# Altium PCB PCB.PcbDoc (part 1 of 2)
Units mm, origin at the board's own origin, x right, y up, seen from the top; angles counter-clockwise.
Board outline 53.59 x 68.71 mm, 2 copper layers (Top Layer, Bottom Layer), stack 1.571 mm thick; 66 components, 64 nets, 259 pads, 241 vias.
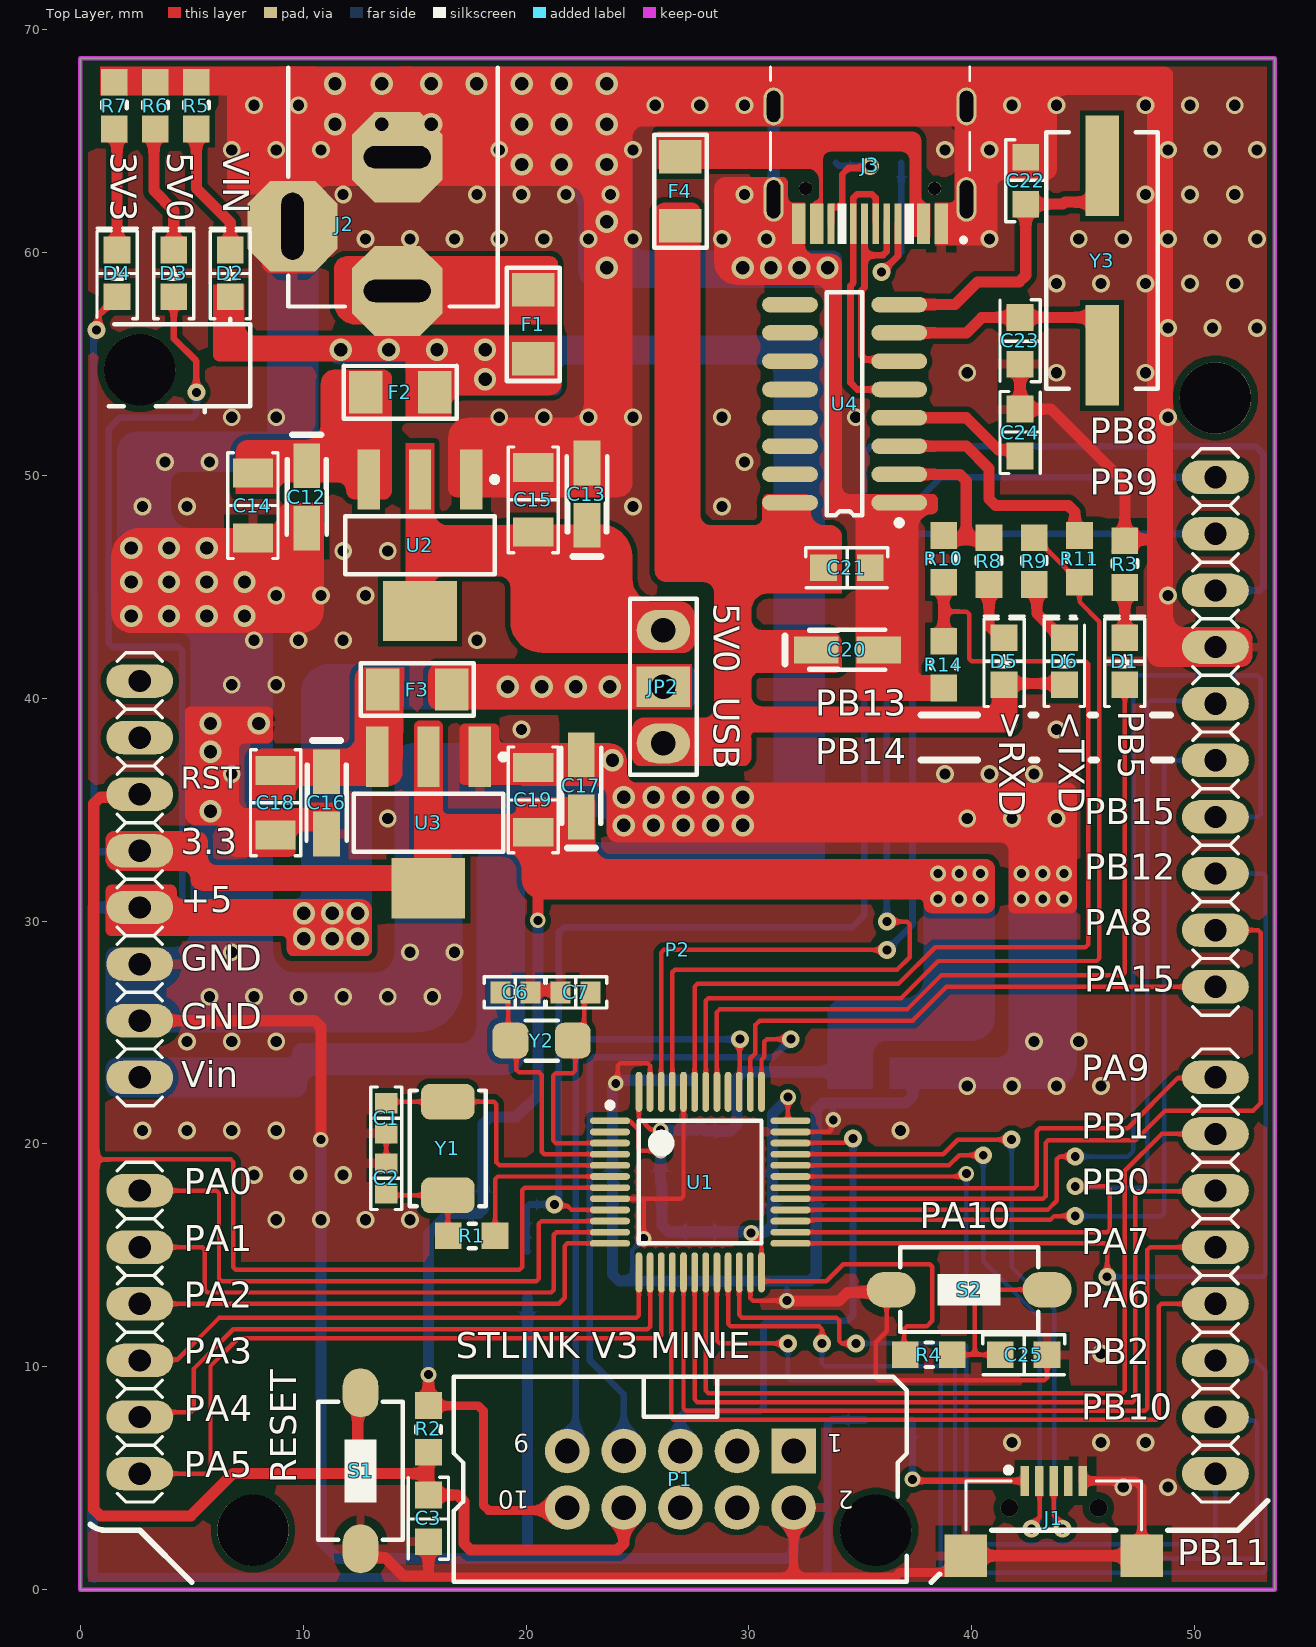
[diagram p0: Top Layer view]
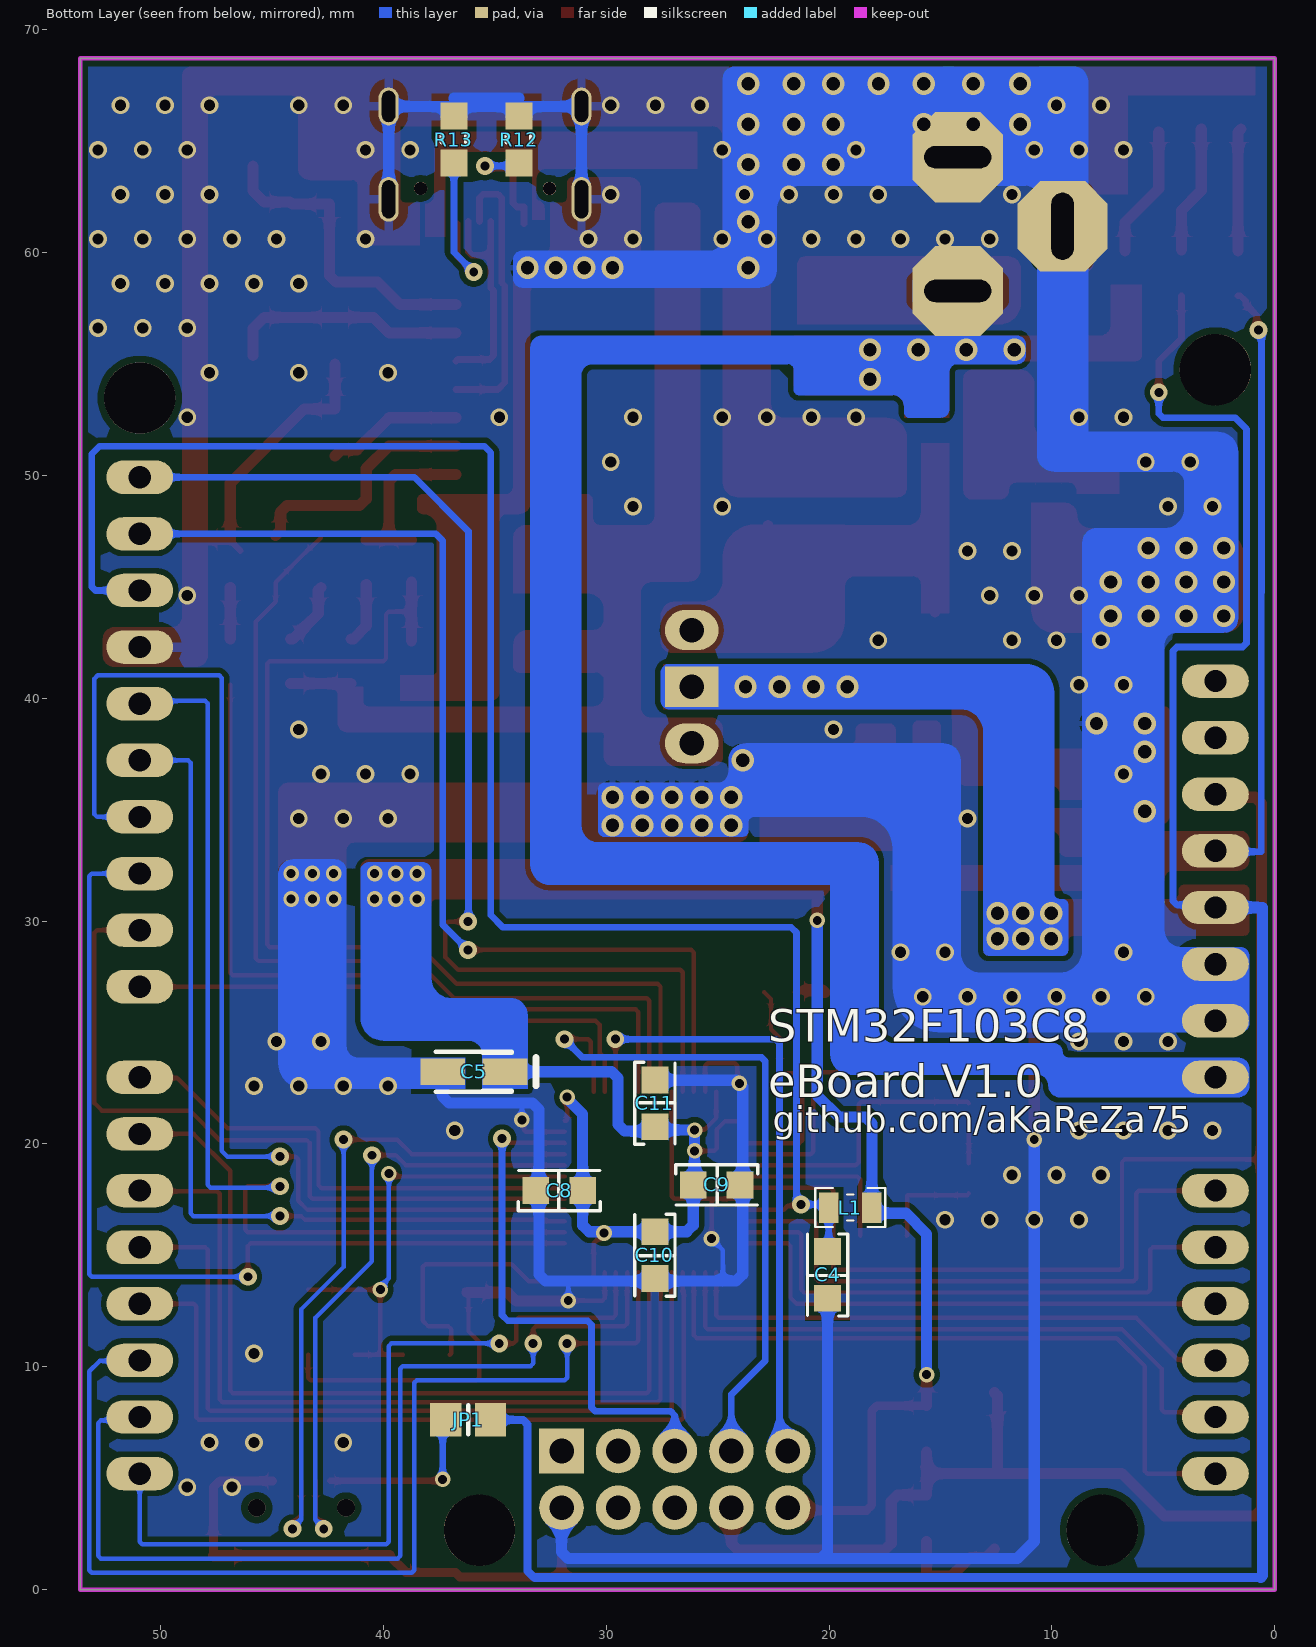
[diagram p1: Bottom Layer view, seen from below]

## Layer stack, top to bottom
Top Solder: solder mask 0.0102, Solder Resist, Dk 3.5
Top Layer: signal copper 0.0356
Dielectric 1: dielectric 1.5, FR-4, Dk 4.8
Bottom Layer: signal copper 0.0356
Bottom Solder: solder mask 0.0102, Solder Resist, Dk 3.5

## Board outline
0,0 0,68.707 53.594,68.707 53.594,0

## Design rules (kind name [scope] priority, off if disabled: settings)
AcuteAngle [All] p1: minimum=6.00000000000000E+0001 checktracksonly=TRUE
AssemblyTestPointUsage [All] p1 off:
AssemblyTestpoint [All] p1 off: testpointundercomponent=TRUE minsize=1.016 maxsize=2.54 preferedsize=1.524 minholesize=0 maxholesize=1.016 preferedholesize=0.813 testpointgrid=0.025 usegrid=TRUE gridtolerance=0 allowsidetop=TRUE allowsidebottom=TRUE
BoardOutlineClearance [All] p1: gap=0.2 ignorepadtopadclearanceinfootprint=FALSE
Clearance Poly_Clearance [All vs InPolygon] p1: gap=0.25 ignorepadtopadclearanceinfootprint=TRUE except(0.3: Arc-Hole Track-Hole SMDPad-Hole THPad-Hole Via-Hole Fill-Hole Poly-Hole Region-Hole Text-Hole)
Clearance [All] p2: gap=0.2 ignorepadtopadclearanceinfootprint=FALSE except(0.3: Arc-Hole Track-Hole SMDPad-Hole THPad-Hole Via-Hole Fill-Hole Poly-Hole Region-Hole Text-Hole)
FabricationTestPointUsage [All] p1 off: valid=0 allowmultiple=FALSE
FabricationTestpoint [All] p1 off: side=3 testpointundercomponent=TRUE minsize=1.016 maxsize=2.54 preferedsize=1.524 minholesize=0 maxholesize=1.016 preferedholesize=0.813 testpointgrid=0.025 allowsidetop=TRUE allowsidebottom=TRUE usegrid=TRUE gridtolerance=0
HoleSize [All] p1: absolutevalues=TRUE maxlimit=10 minlimit=0.4 maxpercent=80.000 minpercent=20.000
HoleToHoleClearance [All] p1: gap=0.3 allowstackedmicrovias=TRUE
MinimumAnnularRing [All] p1: minimumring=0.15
MinimumSolderMaskSliver [All] p1: minsoldermaskwidth=0.01
PolygonConnect [All] p1: thpad.connectstyle=Relief thpad.reliefconductorwidth=0.4 thpad.reliefentries=4 thpad.polygonreliefangle="90 Angle" thpad.airgapwidth=0.4 smdpad.connectstyle=Relief smdpad.reliefconductorwidth=0.4 smdpad.reliefentries=4 smdpad.polygonreliefangle="90 Angle" smdpad.airgapwidth=0.4 via.connectstyle=Direct via.reliefconductorwidth=0.254 via.reliefentries=4 via.polygonreliefangle="90 Angle" via.airgapwidth=0.254
RoutingVias [All] p1: holewidth=0.4 width=0.7 viastyle="Through Hole" minholewidth=0.4 minwidth=0.7 maxholewidth=3 maxwidth=6
SilkToSilkClearance [All] p1: silktosilkclearance=0
SilkToSolderMaskClearance [IsPad] p1: minsilkscreentomaskgap=0.01 clearancetoexposedcopper=TRUE
SolderMaskExpansion [All] p1: expansion=0.102 istentingtop=FALSE
Width [All] p1: maxlimit=10 minlimit=0.2 preferedwidth=0.2
21 further rules are at their usual default settings.

## Classes and differential pairs
component class U_USBtoTTL: C20 C21 C22 C23 C24 D5 D6 F4 J3 R8 R9 R10 R11 R12 R13 R14 U4 Y3
component class U_MicroController: C1 C2 C3 C4 C5 C6 C7 C8 C9 C10 C11 C25 D1 J1 JP1 L1 P1 P2 R1 R2 R3 R4 S1 S2 U1 Y1 Y2
component class U_Supply: C12 C13 C14 C15 C16 C17 C18 C19 D2 D3 D4 F1 F2 F3 J2 JP2 R5 R6 R7 U2 U3

## Components (designator, comment, footprint, x,y, rotation, side; value= is the part's Value field where it differs from the comment)
C1 "20p" "CAP 0603/1608" 13.73,21.151 r270 top
C2 "20p" "CAP 0603/1608" 13.726,18.456 r90 top
C3 "100n" "CAP 0805/2012" 15.621,3.175 r270 top
C4 "100n" "CAP 0805/2012" 20.066,14.097 r270 bottom
C5 "10u" SMT_C_Tantalum_A 35.941,23.241 r0 bottom
C6 "12.5p" "CAP 0603/1608" 19.518,26.797 r0 top
C7 "12.5p" "CAP 0603/1608" 22.225,26.797 r180 top
C8 "100n" "CAP 0805/2012" 32.131,17.907 r0 bottom
C9 "100n" "CAP 0805/2012" 25.019,18.161 r180 bottom
C10 "100n" "CAP 0805/2012" 27.813,14.986 r270 bottom
C11 "100n" "CAP 0805/2012" 27.813,21.844 r90 bottom
C12 "10u" SMT_C_Tantalum_A 10.16,49.022 r270 top
C13 "22u" SMT_C_Tantalum_A 22.733,49.149 r90 top
C14 "100n" "CAP 1206/3216" 7.747,48.641 r270 top
C15 "100n" "CAP 1206/3216" 20.32,48.895 r90 top
C16 "10u" SMT_C_Tantalum_A 11.049,35.306 r270 top
C17 "22u" SMT_C_Tantalum_A 22.479,36.068 r90 top
C18 "100n" "CAP 1206/3216" 8.763,35.306 r270 top
C19 "100n" "CAP 1206/3216" 20.32,35.433 r90 top
C20 "10u" SMT_C_Tantalum_A 34.414,42.164 r0 top
C21 "100n" "CAP 0805/2012" 34.417,45.847 r0 top
C22 "22p" "CAP 0805/2012" 42.418,63.237 r90 top
C23 "22p" "CAP 0805/2012" 42.164,56.007 r270 top
C24 "10n" "CAP 0805/2012" 42.164,51.943 r90 top
C25 "100n" "CAP 0805/2012" 42.35,10.541 r0 top
D1 "Green" "LED 0805/2012 GREEN" 46.863,41.656 r90 top
D2 "Yellow" "LED 0805/2012 YELLOW" 6.731,59.055 r90 top
D3 "Red" "LED 0805/2012 RED" 4.191,59.055 r90 top
D4 "Green" "LED 0805/2012 GREEN" 1.651,59.055 r90 top
D5 "RED" "LED 0805/2012 RED" 41.444,41.656 r90 top value=Red
D6 "RED" "LED 0805/2012 RED" 44.154,41.656 r90 top value=Red
F1 "3A" 1206_F 20.32,56.769 r270 top
F2 "0.5A" 1206_F 14.351,53.721 r180 top
F3 "0.5A" 1206_F 15.113,40.386 r180 top
F4 "500m" 1206_F 26.924,62.738 r270 top
J1 "Micro" USB_Micro_Standard 43.675,3.203 r90 top
J2 "Female" "Power Jack BIG" 14.224,72.771 r270 top
J3 "12b" "HRO_TYPE-C-31-M-12 - Extended" 35.433,66.548 r180 top
JP1 "Jumper" "RESC2012M (0805)" 36.195,7.62 r180 bottom
JP2 "0b" "jumper selector" 26.162,43.053 r270 top
L1 "100u" IND0805 19.05,17.145 r0 bottom
P1 "STLinkV3-minie" IDC2.54-10PIN 26.924,4.953 r180 top
P2 "UNO" ARDUINO_UNO_CONNECTOR 2.667,54.737 r270 top locked
R1 "390b" "RES 0805 (2012X06L)" 18.41,15.875 r180 top
R2 "10K" "RES 0805 (2012X06L)" 15.621,6.366 r90 top
R3 "1k" "RES 0805 (2012X06L)" 46.863,46.863 r270 top value=1K
R4 "10K" "RES 0805 (2012X06L)" 38.916,10.541 r180 top
R5 "1.8k" "RES 0805 (2012X06L)" 5.207,67.437 r270 top value=1.8K
R6 "680b" "RES 0805 (2012X06L)" 3.365,67.437 r270 top
R7 "220b" "RES 0805 (2012X06L)" 1.524,67.437 r270 top
R8 "680" "RES 0805 (2012X06L)" 40.767,46.999 r270 top
R9 "680" "RES 0805 (2012X06L)" 42.799,46.999 r270 top
R10 "1K" "RES 0805 (2012X06L)" 38.735,47.101 r270 top
R11 "1K" "RES 0805 (2012X06L)" 44.831,47.101 r270 top
R12 "4.7K" "RES 0805 (2012X06L)" 33.909,65.913 r270 bottom
R13 "4.7K" "RES 0805 (2012X06L)" 36.83,65.913 r270 bottom
R14 "1.8K" "RES 0805 (2012X06L)" 38.735,40.656 r90 top
S1 "PB" SW_PB_SMD_2PIN_SPST_6X3X2 12.573,5.334 r90 top
S2 "PB" SW_PB_SMD_2PIN_SPST_6X3X2 39.878,13.462 r180 top
U1 "STM32F103C8T6" LQFP48_N 27.813,18.288 r0 top
U2 "5V" SOT223_M 15.24,46.863 r270 top
U3 "3.3V" SOT223_M 15.621,34.417 r270 top
U4 "CH340G" SO16_M 34.29,53.213 r180 top
Y1 "8MHz" XTL_2_5032 16.489,19.796 r270 top
Y2 "32.768KHz" XTL_2_3215 20.701,24.638 r0 top
Y3 "12M" "Crystal SMD" 45.847,59.631 r270 top

## Footprints (in the part's own frame and the unit in brackets; to place one, negate y for a bottom-side part, rotate by r counter-clockwise, add the part's x,y. Pads: shape width x height; smd on the part's side, far side on the other; paste and mask are expansions set on the pad)
1206_F [mm] "Surface mount FUSE 1206"
  rect 1.5x1.9 smd: 1(-1.55,0) 2(1.55,0)
  silkscreen extent -2.54,-1.18 2.54,1.18, body extent -1.6,-0.83 1.6,0.83, height 0.56
ARDUINO_UNO_CONNECTOR [mm] "Arduino Uno Connector"
  oval 1.5x3 hole 1: AD1(36.83,0) AD2(39.37,0) AD3(41.91,0) AD4(44.45,0) AD5(46.99,0) AD6(49.53,0) IOH1(27.686,48.26) IOH2(25.146,48.26) IOH3(22.606,48.26) IOH4(20.066,48.26) IOH5(17.526,48.26) IOH6(14.986,48.26) IOH7(12.446,48.26) IOH8(9.906,48.26) IOH9(7.366,48.26) IOH10(4.826,48.26) IOL1(49.53,48.26) IOL2(46.99,48.26) IOL3(44.45,48.26) IOL4(41.91,48.26) IOL5(39.37,48.26) IOL6(36.83,48.26) IOL7(34.29,48.26) IOL8(31.75,48.26) POW1(13.97,0) POW2(16.51,0) POW3(19.05,0) POW4(21.59,0) POW5(24.13,0) POW6(26.67,0) POW7(29.21,0) POW8(31.75,0)
  round 3.2 hole 3.2: H1(0,0) H2(52.07,5.08) H3(52.07,33.02) H4(1.27,48.26)
  silkscreen extent 3.56,-2.21 54.41,50.6, body extent 3.31,-1.15 51.13,49.54, height 8.55
"CAP 0603/1608" [mm] "Chip Capacitor, 2-Leads, Body 1.60x0.80mm, IPC Medium Density"
  rect 0.9x1 smd: 1(-0.675,0) 2(0.675,0)
  silkscreen extent -1.4,-0.7 1.4,0.7, body extent -0.8,-0.41 0.8,0.41, height 0.82
"CAP 0805/2012" [mm] "Chip Capacitor, 2-Leads, Body 2.00x1.20mm, IPC Medium Density"
  rect 1.2x1.2 smd: 1(-1.075,0) 2(1.025,0)
  silkscreen extent -1.86,-0.9 1.82,0.9, body extent -1,-0.64 1,0.64, height 1.26
"CAP 1206/3216" [mm] "Chip Capacitor, 2-Leads, Body 3.25x1.60mm, IPC Medium Density"
  rect 1.3x1.8 smd: 1(-1.45,0) 2(1.45,0)
  silkscreen extent -2.37,-1.12 2.37,1.12, body extent -1.6,-0.81 1.6,0.81, height 1.62
"Crystal SMD" [mm] "DESIGNER ABBAS BASEREH"
  rect 4.5x1.5 smd: 1(-4.25,0) 2(4.25,0)
  silkscreen extent -5.75,-2.5 5.75,2.5, body extent -6.21,-2.25 6.09,2.25, height 5.18
"HRO_TYPE-C-31-M-12 - Extended" [mm]
  rect 0.6x1.8 smd mask+0.05: A1_B12(-3.2,5.264) A4_B9(-2.4,5.264) B1_A12(3.2,5.264) B4_A9(2.4,5.264)
  rect 0.3x1.8 smd mask+0.05: A5(-1.25,5.264) A6(-0.25,5.264) A7(0.25,5.264) B5(1.75,5.264) B6(0.75,5.264) B7(-0.75,5.264)
  oval 0.9x2 hole 0.6 slot 1.7 at 90 deg: S1(-4.325,4.17) S2(4.325,4.17)
  oval 0.9x1.7 hole 0.6 slot 1.4 at 90 deg: S3(-4.325,0) S4(4.325,0)
  round 0.6 hole 0.6 unplated: ""(-2.89,3.68) ""(2.89,3.68)
  silkscreen extent -4.47,-1.77 4.47,6.17, body extent -4.47,-2.6 4.47,5.31, height 3.31
IDC2.54-10PIN [mm] "Connector; IDC, Low Profile Male Header, Thru-Hole; 10 Position; Vertical; Pitch 2.54 mm; 20.32 x 9.2 x 9.45 mm (LxWxH) DESIGNER : ABBAS BASEREH"
  rect 2x2 hole 1.1: 1(-5.08,-1.27)
  round 2 hole 1.1: 2(-5.08,1.27) 3(-2.54,-1.27) 4(-2.54,1.27) 5(0,-1.27) 6(0,1.27) 7(2.54,-1.27) 8(2.54,1.27) 9(5.08,-1.27) 10(5.08,1.27)
  silkscreen extent -10.16,-4.6 10.16,4.6, body extent -10.15,-4.25 10.15,4.6, height 9.17
IND0805 [mm] "Chip Inductor, 2-Leads, Body 2/00x1/25mm, IPC Medium Density DESIGNER:ABBAS BASEREH"
  rect 0.87x1.37 smd: 1(-0.97,0) 2(0.97,0)
  silkscreen extent -1.58,-0.87 1.58,0.87, body extent -1.02,-0.65 1.02,0.65, height 0.5
"jumper selector" [mm]
  oval 1.8x2.4 hole 1.1: 1(0,0) 3(5.08,0)
  rect 1.8x2.4 hole 1.1: 2(2.54,0)
  silkscreen extent -1.4,-1.5 6.48,1.5, body extent -1.24,-1.27 6.38,1.27, height 10.16
"LED 0805/2012 GREEN" [mm] "Chip Diode, 2-Leads, Body 2.00x1.25mm, IPC Medium Density"
  rect 1.2x1.2 smd: 1(-1.05,0) 2(1.05,0)
  silkscreen extent -2.03,-0.9 2.03,0.9, body extent -1,-0.62 1,0.63, height 0.9
"LED 0805/2012 RED" [mm] "Chip Diode, 2-Leads, Body 2.00x1.25mm, IPC Medium Density"
  rect 1.2x1.2 smd: 1(-1.05,0) 2(1.05,0)
  silkscreen extent -2.03,-0.9 2.03,0.9, body extent -1,-0.62 1,0.63, height 0.9
"LED 0805/2012 YELLOW" [mm] "Chip Diode, 2-Leads, Body 2.00x1.25mm, IPC Medium Density"
  rect 1.2x1.2 smd: 1(-1.05,0) 2(1.05,0)
  silkscreen extent -2.03,-0.9 2.03,0.9, body extent -1,-0.62 1,0.63, height 0.9
LQFP48_N [mm] "Thin QFP, 48-Leads, Body 7x7mm, Pitch 0.5mm, IPC Medium Density"
  oval 1.8x0.3 smd: 1(-4.05,2.75) 2(-4.05,2.25) 3(-4.05,1.75) 4(-4.05,1.25) 5(-4.05,0.75) 6(-4.05,0.25) 7(-4.05,-0.25) 8(-4.05,-0.75) 9(-4.05,-1.25) 10(-4.05,-1.75) 11(-4.05,-2.25) 12(-4.05,-2.75) 25(4.05,-2.75) 26(4.05,-2.25) 27(4.05,-1.75) 28(4.05,-1.25) 29(4.05,-0.75) 30(4.05,-0.25) 31(4.05,0.25) 32(4.05,0.75) 33(4.05,1.25) 34(4.05,1.75) 35(4.05,2.25) 36(4.05,2.75)
  oval 0.3x1.8 smd: 13(-2.75,-4.05) 14(-2.25,-4.05) 15(-1.75,-4.05) 16(-1.25,-4.05) 17(-0.75,-4.05) 18(-0.25,-4.05) 19(0.25,-4.05) 20(0.75,-4.05) 21(1.25,-4.05) 22(1.75,-4.05) 23(2.25,-4.05) 24(2.75,-4.05) 37(2.75,4.05) 38(2.25,4.05) 39(1.75,4.05) 40(1.25,4.05) 41(0.75,4.05) 42(0.25,4.05) 43(-0.25,4.05) 44(-0.75,4.05) 45(-1.25,4.05) 46(-1.75,4.05) 47(-2.25,4.05) 48(-2.75,4.05)
  silkscreen extent -4.17,-2.75 2.75,3.57, body extent -4.51,-4.51 4.51,4.51, height 1.35
"Power Jack BIG" [mm] "Power Adaptor Jack"
  oct 4.05x4.05 hole 1 slot 3 at 90 deg: 1(14.5,0) 2(8.5,0)
  oct 4.05x4.05 hole 1 slot 3 at 0 deg: 3(11.6,-4.7)
  Top Layer region: 13.125,-5.7 13.625,-5.2 13.625,-4.2 13.125,-3.7 10.075,-3.7 9.575,-4.2 9.575,-5.2 10.075,-5.7
  Top Layer region: 7.5,-1.525 8,-2.025 9,-2.025 9.5,-1.525 9.5,1.525 9,2.025 8,2.025 7.5,1.525
  Top Layer region: 13.5,-1.525 14,-2.025 15,-2.025 15.5,-1.525 15.5,1.525 15,2.025 14,2.025 13.5,1.525
  Bottom Layer region: 13.125,-5.7 13.625,-5.2 13.625,-4.2 13.125,-3.7 10.075,-3.7 9.575,-4.2 9.575,-5.2 10.075,-5.7
  Bottom Layer region: 7.5,-1.525 8,-2.025 9,-2.025 9.5,-1.525 9.5,1.525 9,2.025 8,2.025 7.5,1.525
  Bottom Layer region: 13.5,-1.525 14,-2.025 15,-2.025 15.5,-1.525 15.5,1.525 15,2.025 14,2.025 13.5,1.525
  silkscreen extent 4.49,-4.9 15.2,4.5, body extent 0,-4.9 15.2,4.5, height 11
"RES 0805 (2012X06L)" [mm] "Chip Resistor, 2-Leads, Body 2.0x1.3mm, IPC High Density _ (0.100 W)"
  rect 1.2x1.2 smd: 1(-0.2,0) 2(1.9,0)
  silkscreen extent 0.67,-0.55 0.97,0.55, body extent -0.19,-0.63 1.84,0.64, height 0.6
"RESC2012M (0805)" [mm] "Chip Resistor, Body 2.0x1.3mm, IPC Low Density"
  rect 1.4x1.5 smd: 1(-1,0) 2(1,0)
  silkscreen extent 0,-0.65 0,0.65, body extent -1.02,-0.63 1.02,0.64, height 0.6
SMT_C_Tantalum_A [mm] "Capacitor, SM Tantalum; Body 3.2 x 1.6 mm (LxW typ)"
  rect 2x1.2 smd: 1(-1.4,0) 2(1.4,0)
  silkscreen extent -2.79,-0.9 1.7,0.9, body extent -1.6,-0.8 1.6,0.8, height 1.6
SO16_M [mm] "16-Pin Small Outline Integrated Circuit 1.27 mm Pitch, IPC Low Density - DESIGNER ABBAS BASEREH"
  oval 2.5x0.7 smd: 1(-2.45,4.445) 2(-2.45,3.175) 3(-2.45,1.905) 4(-2.45,0.635) 5(-2.45,-0.635) 6(-2.45,-1.905) 7(-2.45,-3.175) 8(-2.45,-4.445) 9(2.45,-4.445) 10(2.45,-3.175) 11(2.45,-1.905) 12(2.45,-0.635) 13(2.45,0.635) 14(2.45,1.905) 15(2.45,3.175) 16(2.45,4.445)
  silkscreen extent -2.58,-5 0.8,5.47, body extent -3,-4.97 3,4.96, height 1.62
SOT223_M [mm] "SOT223, 4-Leads, Body 6.5x3.5mm, Pitch 2.3mm, Lead Span 7mm, IPC Low Density"
  rect 2.7x1 smd: 1(-2.95,2.3) 2(-2.95,0) 3(-2.95,-2.3)
  rect 2.7x3.3 smd: 4(2.95,0)
  silkscreen extent -3.07,-3.35 1.3,3.48, body extent -3.42,-3.38 3.78,3.32, height 1.85
SW_PB_SMD_2PIN_SPST_6X3X2 [mm] "SWITCH, PUSHBUTTON, SMD, SPST, 6X3.5X2.5mm, RS-282G05A3, SKQYPA, 50000 Cycles"
  oval 2.2x1.6 smd mask+0.1: 1(-3.5,0) 2(3.5,0)
  silkscreen extent -3.1,-1.9 3.1,1.9, body extent -3.4,-1.86 3.4,1.86, height 2.5
USB_Micro_Standard [mm] "Micro USB Dock 5 Pin Standard"
  rect 1.35x0.4 smd: 1(1.679,1.3) 2(1.679,0.65) 3(1.679,0) 4(1.679,-0.65) 5(1.679,-1.3)
  rect 1.9x1.9 smd: 6(-1.679,-3.95) 7(-1.679,3.95)
  silkscreen extent -0.53,-3.94 2.29,3.94, body extent -4.32,-3.99 1.11,3.99, height 2.67
XTL_2_3215 [mm] "ABS07 3.2x1.5mm"
  rrect50% 1.6x1.6 smd mask+0.075: 1(-1.4,0) 2(1.4,0)
  Top Layer pour cut-out: -1.4,0.8 -1.4,-0.8 1.4,-0.8 1.4,0.8
  silkscreen extent -0.72,-0.9 0.72,0.9, body extent -1.61,-0.76 1.61,0.76, height 0.91
XTL_2_5032 [mm] "ABM3"
  rrect50% 1.6x2.4 smd: 1(-2.1,0) 2(2.1,0)
  Top Layer pour cut-out: -1.8,-1.6 1.8,-1.6 1.8,1.6 -1.8,1.6
  silkscreen extent -2.6,-1.7 2.6,1.7, body extent -2.6,-1.7 2.6,1.7, height 1.3

## Part data
C1 C2 C6 C7: library part Cap_Multi_SMD, "Bipolar ceramic capacitor SMD", Package=0603, Rating=Rating?, Inflow=inflow?, Type=Type?, Validation=Valid
C3 C4 C8 C9 C10 C11 C21 C25: library part Cap_Multi_SMD_100nF_0805, "Bipolar ceramic capacitor SMD", Package=0805, Rating=50V, Inflow=inflow?, Type=MultiLayer, Validation=Valid
C5 C13 C17 C20: library part Cap_Tantalum, "Tantalum Capacitor,TAJ Series-SMD", Package=Package?, Rating=6.3V, Inflow=inflow?, Type=Tantalum, Validation=Valid
C12 C16: library part Cap_Tantalum, "Tantalum Capacitor,TAJ Series-SMD", Package=Package?, Rating=16V, Inflow=inflow?, Type=Tantalum, Validation=Valid
C14 C15 C18 C19: library part Cap_Multi_SMD_100nF_1206, "Bipolar ceramic capacitor SMD", Package=1206, Rating=50V, Inflow=inflow?, Type=MultiLayer, Validation=Valid
C22 C23 C24: library part Cap_Multi_SMD_0805, "Bipolar ceramic capacitor SMD", Package=0805, Rating=Rating?, Inflow=inflow?, Type=MultiLayer, Validation=Valid
D1 D2 D3 D4 D5 D6: library part Semi_LED_SMD, "LED", Package=Package?, Rating=Rating?, Inflow=inflow?, Type=LED, Validation=Valid
F1 F2 F3 F4: library part Other_Elec_Fuse_SMD, "Short circiut  protection", Package=1206, Rating=Rating?, Inflow=inflow?, Type=Fast, Validation=Valid
J1: library part Con_USB2_Micro, "USB micro female", Package=Package?, Rating=Rating?, Inflow=inflow?, Type=Type?, Validation=NT
J2: library part Con_Power_Jack, "Power Jack", Package=Package?, Rating=Rating?, Inflow=6127, Type=Type?, Validation=Valid
J3: library part Con_USB_C, "USB C Female Connector", Package=SMD, Rating=Rating?, Inflow=inflow?, Type=C, Validation=Valid
JP1: library part Other_Elec_Jumper_0805, "Jumper Component", Package=0805, Rating=Rating?, Inflow=inflow?, Type=Type?, Validation=Valid
JP2: library part SW_Other_JSelector_Dip, "Jumper Selector", Package=Dip, Rating=Rating?, Inflow=5145, Type=Selector, Validation=NT
L1: library part Ind_SMD_0805, "Inductor", Package=0805, Rating=Rating?, Inflow=inflow?, Type=SMD, Validation=Valid
P1: library part Con_Prog_STLinkV3_SWD, "STLINK-V3MINIE debugger/programmer IDC probe for STM32 microcontrollers", Package=Package?, Rating=Rating?, Inflow=7119, Type=SWD, Validation=NT
P2: library part Con_Arduino_UNO_Con, "Arduino UNO Connector", Package=Package?, Rating=Rating?, Inflow=inflow?, Type=Type?, Validation=NT
R1 R2 R3 R4 R5 R6 R7 R8 R9 R10 R11 R12 R13 R14: library part Res_SMD_0805, "Resistor", Package=0805, Rating=0.125W, Inflow=inflow?, Type=10%, Validation=Valid
S1 S2: library part SW_PushButton_2_SMD, "SMT Tactile ‎Switch", Package=SMD, Rating=2b, Inflow=8260, Type=Vertical, Validation=Valid
U1: library part IC_MCU_STM32F103C8T6, "32-Bit mircrocontroller", Package=LQFP48, Rating=CORTEX-M3, Inflow=inflow?, Type=Microcontroller, Validation=NT
U2 U3: library part IC_Reg_AMS1117_3.3, "1'A Positive voltage regulator", Package=SOT223, Rating=1A, Inflow=5217, Type=LDO, Validation=Valid
U4: library part IC_Converter_CH340G, "TTL To USB Chip", Package=SO-16, Rating=Rating?, Inflow=inflow?, Type="USB to TTL", Validation=Valid
Y1: library part Other_Elec_Xtal_8MHZ_SMD, "Crystal Oscillator", Package=5032, Rating=10ppm, Inflow=inflow?, Type=Crystal, Validation=NT
Y2: library part Other_Elec_Xtal_32.768K_SMD, "Crystal Oscillator", Package=3215, Rating=20ppm, Inflow=inflow?, Type=Crystal, Validation=NT
Y3: library part Other_Elec_Xtal_SMD, "Crystal Oscillator", Package=SMD, Rating=Rating?, Inflow=inflow?, Type=Quartz, Validation=Valid

## Via types
v1: diameter 0.8, hole 0.5, Top Layer to Bottom Layer, tented both sides, 129 vias
v2: diameter 1, hole 0.6, Top Layer to Bottom Layer, tented both sides, 63 vias
v3: diameter 0.7, hole 0.4, Top Layer to Bottom Layer, tented both sides, 26 vias
v4: diameter 0.8, hole 0.4, Top Layer to Bottom Layer, tented both sides, 21 vias
v5: diameter 0.8, hole 0.8, Top Layer to Bottom Layer, tented both sides, 2 vias

## Nets (pads, with @x,y where several pads share a name; then routed paths per layer and width w, separated by ;. In a path a pad name is that pad's centre, name@x,y a point inside that pad or via, vN(x,y) a via of type N, cw(c..) or ccw(c..) an arc to the next point about the centre after c; other vN are vias at no path point)
+3.3: C5.1 C8.1 C9.1 C10.1 C11.1 C17.1 C19.1 D4.1 L1.1 P1.10 P2.POW4 R2.2 R4.2 U1.1 U1.24 U1.36 U1.48 U3.2 U3.4 | length 116
  Top Layer w0.2: U1.1@23.763,21.038 23.782,21.019 24.669,21.019 25.033,20.655 25.033,19.802 25.15,19.685 v3(26.035,19.685) ; U1.48@25.063,22.338 25.063,21.165 25.591,20.637 26.226,20.637 v3@26.241,20.622 ; v3(30.099,16.002) 30.563,15.538 U1.24@30.563,14.238 30.563,13.889 30.609,13.843 33.469,13.843 34.231,14.605 38.11,14.605 38.227,14.488 38.227,12.065 37.973,11.811 37.074,11.811 36.957,11.694 36.957,10.6 R4.2@37.016,10.541 ; v3(31.75,22.098) 31.75,21.084 31.796,21.038 U1.36@31.863,21.038
  Top Layer w0.3: v4(0.727,56.515) 0.823,56.611 0.823,57.177 1.301,57.655 1.301,57.805 1.551,58.055 D4.1@1.651,58.055
  Top Layer w0.4: R2.2@15.671,8.316 15.732,8.255 17.852,8.255 18.087,8.021 18.087,3.79 18.321,3.556 21.717,3.556 P1.10@21.844,3.683
  Top Layer w0.5: P2.POW4@2.667,33.147 4.826,33.147 ; R2.2@15.621,8.266 v3(15.621,9.652) ; v3(20.532,30.031) 20.532,31.454 20.574,31.496
  Bottom Layer w0.3: 0.615,33.108 0.595,56.285 0.595,56.408 0.69,56.503 v4@0.705,56.516 ; 0.645,33.108 P2.POW4@2.628,33.108
  Bottom Layer w0.5: P2.POW4@2.628,33.108 P2.POW4@2.667,33.147 ; v3(15.621,9.652) 15.621,15.963 16.549,16.891 17.895,16.891 18.08,17.076 L1.1@18.08,17.145 18.08,20.916 18.373,21.209 19.558,21.209 20.532,22.183 v3(20.532,30.031) ; v3(31.75,22.098) 31.75,22.044 31.056,21.349 C8.1@31.056,17.907 31.056,16.354 30.763,16.061 C10.1@27.813,16.061 26.387,16.061 26.094,16.354 C9.1@26.094,18.161 26.035,18.22 v3(26.035,19.685) v3(26.035,20.622) 27.667,20.622 C11.1@27.813,20.769 28.008,20.574 29.171,20.574 29.464,20.867 29.464,22.948 29.757,23.241 C5.1@34.541,23.241
  other v3: 38.481,30.988 39.433,30.988 40.386,30.988 38.481,32.131 39.433,32.131 40.386,32.131
+5: D3.1 F3.1 JP1.2 JP2.2 P2.POW5 | length 119.3
  Top Layer w0.3: D3.1@4.191,58.055 4.191,56.134 5.207,55.118 v4(5.207,53.721)
  Top Layer w0.5: F3.1@16.513,40.386 JP2.2@26.035,40.386
  Bottom Layer w0.3: P2.POW5@2.667,30.607 2.785,30.725 4.396,30.725 4.572,30.901 4.572,42.115 4.396,42.291 1.446,42.291 1.27,42.467 1.27,52.07 1.766,52.566 5.032,52.591 5.207,52.766 v4(5.207,53.721)
  Bottom Layer w0.35: 33.206,0.55 33.238,0.55 33.528,0.84 33.528,7.415 33.733,7.62 JP1.2@35.195,7.62
  Bottom Layer w0.4: 0.635,0.55 33.206,0.55
  Bottom Layer w0.5: 0.635,0.55 0.55,0.635 0.55,30.607 P2.POW5@2.667,30.607
  other v2: 10.033,29.21 11.303,29.21 12.446,29.21 10.033,30.353 11.303,30.353 12.446,30.353 19.177,40.513 20.701,40.513 22.225,40.513 23.749,40.513
+5R: C13.1 C15.1 JP2.1 U2.2 U2.4 | length 24.1
  Top Layer w0.5: U2.4@15.24,43.863 15.24,47.244 ; U2.2@15.24,50.063 15.24,47.244 ; C13.1@22.733,47.749 22.733,47.283 22.44,46.99 20.571,46.99 C15.1@20.32,47.241 ; JP2.1@26.162,43.053 23.622,43.053 21.907,43.053 20.828,43.053 20.32,43.561 20.32,44.386 20.32,45.974 C15.1@20.32,47.241 ; 15.24,47.244 15.243,47.241 C15.1@20.32,47.241
AVCC: C4.1 L1.2 P2.IOH8 U1.9 | length 79.3
  Top Layer w0.2: v4(21.266,17.281) 21.324,17.223 21.848,17.223 22.034,17.038 U1.9@23.763,17.038
  Bottom Layer w0.3: C4.1@20.066,15.172 20.02,15.218 L1.2@20.02,17.145 20.156,17.281 v4(21.266,17.281) 21.266,17.416 21.463,17.612 21.463,29.484 21.697,29.718 34.632,29.718 35.179,30.265 35.179,51.015 35.472,51.308 52.72,51.308 53.086,50.942 53.086,45.007 52.91,44.831 P2.IOH8@50.927,44.831
GND: C1.2 C2.2 C3.2 C4.2 C5.2 C6.2 C7.2 C8.2 C9.2 C10.2 C11.2 C12.2 C13.2 C14.2 C15.2 C16.2 C17.2 C18.2 C19.2 C20.2 C21.2 C22.2 C23.2 C24.2 C25.2 J1.5 J1.6 J1.7 J2.2 J2.3 J3.A1_B12 J3.B1_A12 J3.S1 J3.S2 J3.S3 J3.S4 P1.2 P2.IOH7 P2.POW6 P2.POW7 R3.1 R5.1 R6.1 R7.1 R12.1 R13.1 R14.1 S1.1 S2.2 U1.8 U1.23 U1.35 U1.44 U1.47 U2.1 U3.1 U4.1 | length 280.8
  Top Layer w0.2: C2.2@13.726,19.131 13.726,20.472 C1.2@13.73,20.476 ; C7.2@21.106,26.797 C7.2@21.55,26.797 ; U1.8@23.763,17.538 25.144,17.538 ; v3(24.022,22.714) 24.118,22.809 24.118,23.505 24.235,23.622 25.446,23.622 25.563,23.505 U1.47@25.563,22.338 ; v3(25.273,15.748) 25.273,17.409 25.144,17.538 ; U1.44@27.063,22.338 27.063,17.655 26.946,17.538 25.144,17.538 ; U1.23@30.063,14.238 30.063,13.086 30.18,12.969 v3(31.7,12.969) ; U1.35@31.863,20.538 33.619,20.538 33.686,20.605 33.686,20.986 v3(33.782,21.082) ; S2.2@36.378,13.462 36.251,13.335 36.178,13.262 36.178,11.6 35.687,11.109 35.687,9.525 35.814,9.398 43.258,9.398 43.375,9.515 C25.2@43.375,10.541
  Top Layer w0.3: R3.1@46.413,46.613 R3.1@46.863,47.063 R3.1@46.863,47.101
  Top Layer w0.4: 15.328,0.615 15.376,0.567 32.004,0.567 ; P1.2@32.004,3.683 32.004,0.567 ; J1.7@39.725,1.524 38.975,0.774 36.764,0.774 36.557,0.567 32.004,0.567 ; J1.5@44.975,4.882 47.332,4.882 47.625,4.589 J1.6@47.625,1.524
  Top Layer w0.5: P2.POW7@2.667,25.527 10.502,25.527 10.795,25.234 v3(10.795,20.193) ; 7.342,63.373 7.342,65.405 ; 7.342,67.437 7.342,65.405 ; C18.2@8.763,33.856 8.763,33.871 9.671,34.779 9.671,34.814 9.702,34.783 10.699,34.783 10.699,34.738 11.049,34.388 C16.2@11.049,33.906 ; J2.3@9.524,61.171 9.524,65.279 9.398,65.405 ; S1.1@12.573,1.834 12.966,1.441 13.672,1.441 14.498,0.615 15.328,0.615 ; J2.2@14.224,64.271 12.949,64.271 12.325,64.895 12.198,64.895 12.141,64.952 12.141,64.978 11.848,65.271 11.848,65.278 10.922,65.278 10.795,65.405 9.398,65.405 ; 15.621,0.635 C3.2@15.621,2.15 ; U2.1@17.54,50.063 17.647,50.169 20.32,50.169 20.496,50.345 22.529,50.345 C13.2@22.733,50.549 ; U3.1@17.921,37.617 U3.1@17.921,37.367 17.921,37.299 17.97,37.25 19.953,37.25 C19.2@20.32,36.883 20.412,36.975 22.386,36.975 C17.2@22.479,37.068 ; C6.2@20.193,26.797 20.296,26.9 C7.2@21.106,26.9 ; 26.334,33.909 v2@29.806,33.909 ; v3(31.7,12.969) 31.715,12.954 34.036,12.954 34.417,13.335 S2.2@36.251,13.335 ; C20.2@36.128,42.164 35.817,42.475 35.817,48.676 35.909,48.768 U4.1@36.74,48.768 ; J3.A1_B12@38.633,61.384 J3.A1_B12@38.633,61.284 38.633,61.01 38.683,60.96 39.458,60.96 39.681,61.183 39.681,62.301 J3.S1@39.758,62.378 39.758,64.262 ; J1.7@39.725,1.524 J1.6@47.625,1.524 ; J3.S3@39.758,66.548 39.758,64.262 ; C23.2@42.164,54.982 C24.2@42.164,52.968 43.552,52.968 46.863,49.657 46.863,47.101 46.879,47.117 48.348,47.117 48.641,46.824 48.641,42.711 48.934,42.418 50.8,42.418 P2.IOH7@50.927,42.291 ; C22.2@42.418,64.262 39.758,64.262 ; 7.342,65.405 9.398,65.405
  Bottom Layer w0.2: 24.765,13.843 24.765,15.24 v3(25.273,15.748) ; v3(31.7,12.969) 31.7,13.793 31.75,13.843 ; v3(33.782,21.082) 33.782,21.825 33.801,21.844
  Bottom Layer w0.5: v3(10.795,20.193) 10.795,2.159 11.557,1.397 20.359,1.397 ; C4.2@20.066,13.072 20.066,1.69 20.359,1.397 ; C11.2@27.432,22.869 27.423,22.86 24.169,22.86 v3(24.022,22.714) 23.876,22.567 23.876,18.279 C9.2@23.994,18.161 23.876,18.043 23.876,14.136 24.169,13.843 24.765,13.843 31.75,13.843 32.727,13.843 33.02,14.136 33.02,21.551 33.313,21.844 33.801,21.844 37.048,21.844 37.341,22.137 C5.2@37.341,23.241 ; J3.S2@31.108,62.378 J3.S4@31.108,66.548 J3.S3@39.758,66.548 J3.S1@39.758,62.378 ; P1.2@32.004,3.683 32.004,1.69 31.711,1.397 20.359,1.397 ; 33.909,66.913 36.83,66.913
  other v1: 46.794,4.6 48.794,4.6 41.794,6.6 45.794,6.6 47.794,6.6 45.794,10.6 8.794,16.6 10.794,16.6 12.794,16.6 14.794,16.6 7.794,18.6 9.794,18.6 11.794,18.6 2.794,20.6 4.794,20.6 6.794,20.6 8.794,20.6 36.794,20.6 39.794,22.6 41.794,22.6 43.794,22.6 45.794,22.6 4.794,24.6 6.794,24.6 8.794,24.6 42.794,24.6 44.794,24.6 5.794,26.6 7.794,26.6 9.794,26.6 11.794,26.6 13.794,26.6 15.794,26.6 6.794,28.6 14.794,28.6 16.794,28.6 13.794,34.6 39.794,34.6 41.794,34.6 43.794,34.6 6.794,36.6 38.794,36.6 40.794,36.6 42.794,36.6 19.794,38.6 43.794,38.6 6.794,40.6 8.794,40.6 7.794,42.6 9.794,42.6 11.794,42.6 17.794,42.6 8.794,44.6 10.794,44.6 12.794,44.6 48.794,44.6 11.794,46.6 13.794,46.6 2.794,48.6 4.794,48.6 24.794,48.6 28.794,48.6 3.794,50.6 5.794,50.6 29.794,50.6 6.794,52.6 8.794,52.6 18.794,52.6 20.794,52.6 22.794,52.6 24.794,52.6 28.794,52.6 34.794,52.6 48.794,52.6 39.794,54.6 43.794,54.6 47.794,54.6 48.794,56.6 50.794,56.6 52.794,56.6 43.794,58.6 45.794,58.6 47.794,58.6 49.794,58.6 51.794,58.6 12.794,60.6 14.794,60.6 16.794,60.6 18.794,60.6 20.794,60.6 22.794,60.6 24.794,60.6 28.794,60.6 30.794,60.6 40.794,60.6 44.794,60.6 46.794,60.6 48.794,60.6 50.794,60.6 52.794,60.6 11.794,62.6 17.794,62.6 19.794,62.6 21.794,62.6 23.794,62.6 29.794,62.6 47.794,62.6 49.794,62.6 51.794,62.6 6.794,64.6 8.794,64.6 10.794,64.6 18.794,64.6 24.794,64.6 38.794,64.6 40.794,64.6 48.794,64.6 50.794,64.6 52.794,64.6 7.794,66.6 9.794,66.6 25.794,66.6 27.794,66.6 29.794,66.6 41.794,66.6 43.794,66.6 47.794,66.6 49.794,66.6 51.794,66.6
  other v2: 24.384,34.29 25.717,34.29 27.051,34.29 28.384,34.29 29.718,34.29 5.842,34.925 24.384,35.56 25.717,35.56 27.051,35.56 28.384,35.56 29.718,35.56 23.876,37.211 5.842,37.592 5.842,38.862 8.001,38.862 2.286,43.688 3.979,43.688 5.673,43.688 7.366,43.688 2.286,45.212 3.979,45.212 5.673,45.212 7.366,45.212 2.286,46.736 3.979,46.736 5.673,46.736 23.622,59.309 29.718,59.309 30.988,59.309 32.258,59.309 33.528,59.309 23.622,61.373 19.812,63.944 21.59,63.944 23.622,63.944 11.43,65.754 13.525,65.754 15.748,65.754 19.812,65.754 21.59,65.754 23.622,65.754 11.43,67.564 13.525,67.564 15.748,67.564 17.78,67.564 19.812,67.564 21.59,67.564 23.622,67.564
  other v3: 42.227,30.988 43.18,30.988 44.133,30.988 42.227,32.131 43.18,32.131 44.133,32.131
KEY: C25.1 R4.1 S2.1 U1.31 | length 21.6
  Top Layer w0.2: U1.31@31.863,18.538 39.485,18.538 39.616,18.669 v3(39.751,18.669) ; R4.1@39.116,10.541 40.132,10.541 ; C25.1@41.275,10.541 40.132,10.541 ; S2.1@43.378,13.462 v3(40.132,13.462) 40.132,10.541
  Bottom Layer w0.2: v3(39.751,18.669) 39.751,13.978 40.132,13.597 v3(40.132,13.462)
NetC2_1: C2.1 R1.2 Y1.2 | length 4.6
  Top Layer w0.2: C2.1@13.726,17.781 13.81,17.696 Y1.2@16.489,17.696 16.489,15.896 R1.2@16.51,15.875
NetC12_1: C12.1 C14.1 F2.2 U2.3 | length 9.6
  Top Layer w0.5: C14.1@7.747,50.091 7.924,50.091 9.829,50.091 C12.1@10.16,50.422 10.16,50.052 12.929,50.052 U2.3@12.94,50.063 ; U2.3@12.94,49.813 U2.3@12.94,50.063 ; F2.2@12.951,53.721 12.946,53.716 12.946,50.069 U2.3@12.94,50.063
NetC16_1: C16.1 C18.1 F3.2 U3.3 | length 8.3
  Top Layer w0.5: C18.1@8.763,36.756 10.999,36.756 C16.1@11.049,36.706 11.049,36.579 12.748,36.579 13.321,37.152 13.321,37.617 13.417,37.713 13.417,40.09 F3.2@13.713,40.386
NetC22_1: C22.1 U4.8 Y3.1 | length 14.2
  Top Layer w0.5: U4.8@36.74,57.658 37.344,57.658 39.243,57.658 40.259,58.674 42.125,58.674 42.418,58.967 C22.1@42.418,62.162 44.097,62.162 44.188,62.253 45.347,62.253 45.847,62.753 Y3.1@45.847,63.881
NetC23_1: C23.1 U4.7 Y3.2 | length 10.8
  Top Layer w0.5: U4.7@36.74,56.388 37.344,56.388 39.751,56.388 40.445,57.082 C23.1@42.164,57.082 45.347,57.082 45.847,56.582 Y3.2@45.847,55.381
NetC24_1: C24.1 U4.4 | length 6.1
  Top Layer w0.5: U4.4@36.74,52.578 39.751,52.578 41.182,51.147 41.885,51.147 C24.1@42.164,50.868
NetD1_2: D1.2 R3.2 | length 2.3
  Top Layer w0.5: D1.2@46.863,42.656 R3.2@46.863,44.963
NetD2_2: D2.2 R5.2 | length 6
  Top Layer w0.5: R5.2@5.207,65.405 5.207,62.865 6.731,61.341 D2.2@6.731,60.055